# Altium PCB PCB1.PcbDoc
Units mm, origin at the board's own origin, x right, y up, seen from the top; angles counter-clockwise.
Board outline 104.52 x 39.62 mm, 4 copper layers (Layer 1, Layer 2, Layer 3, Layer 4), stack 0.603 mm thick; 8 components, 14 nets, 58 pads, 0 vias.
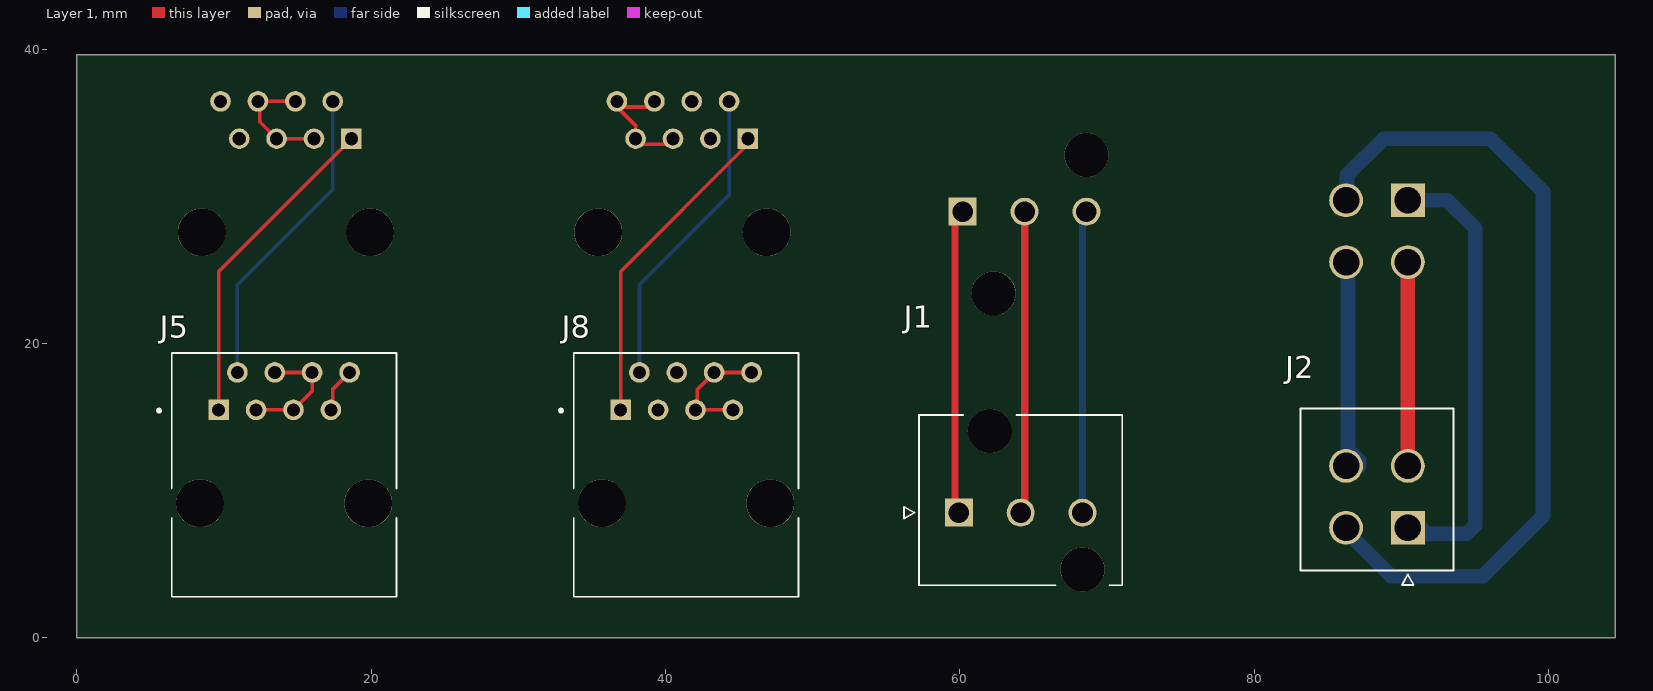
[diagram p0: Layer 1 view]
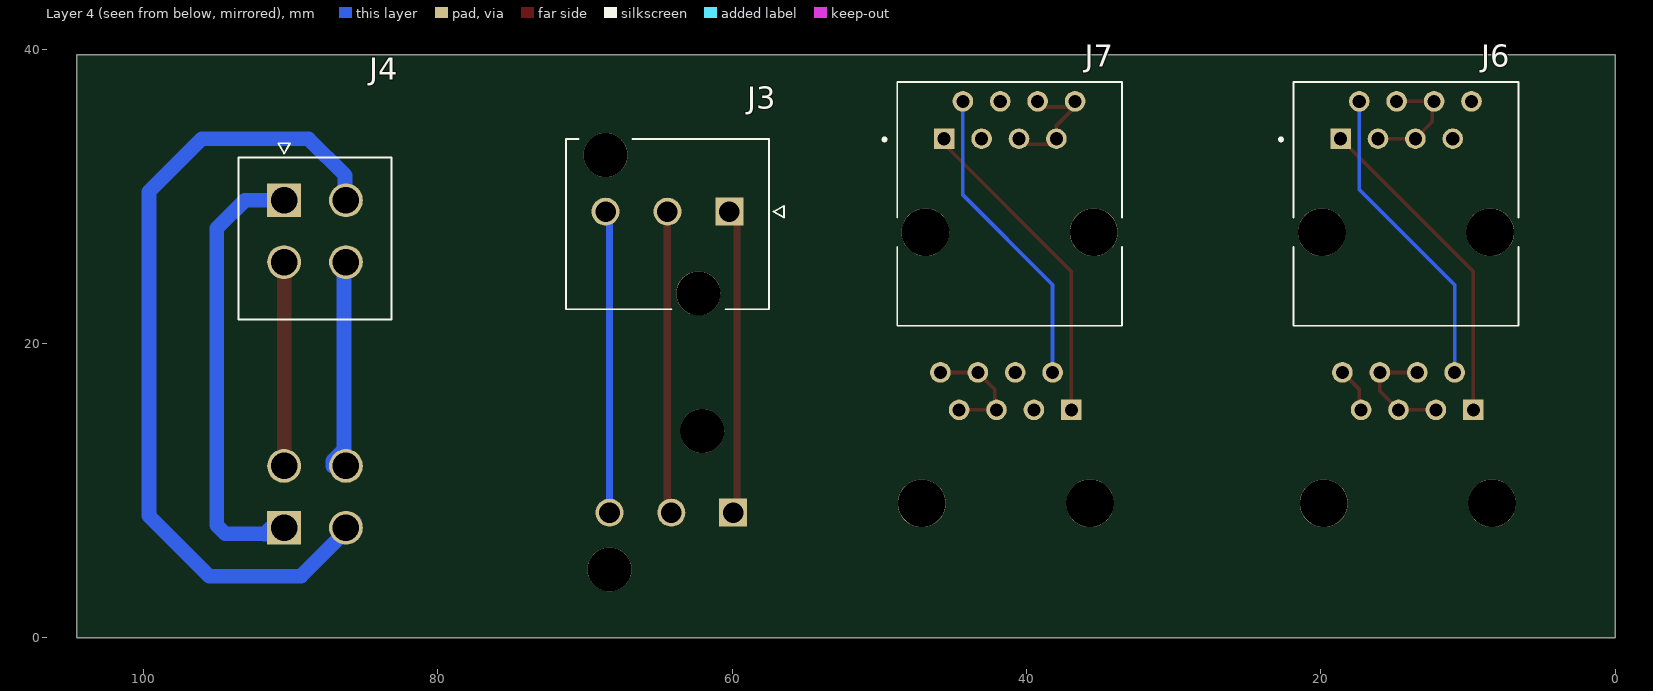
[diagram p1: Layer 4 view, seen from below]
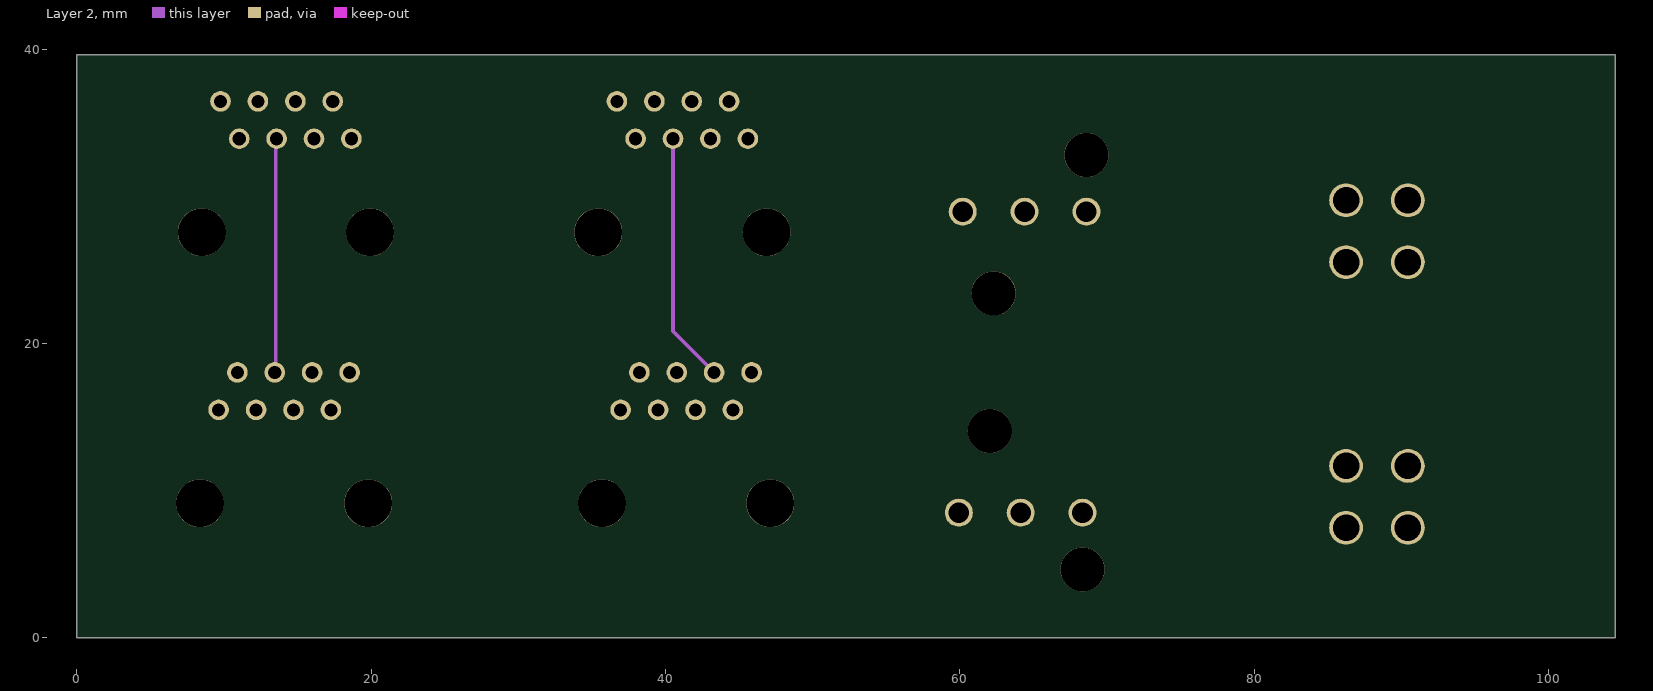
[diagram p2: Layer 2]
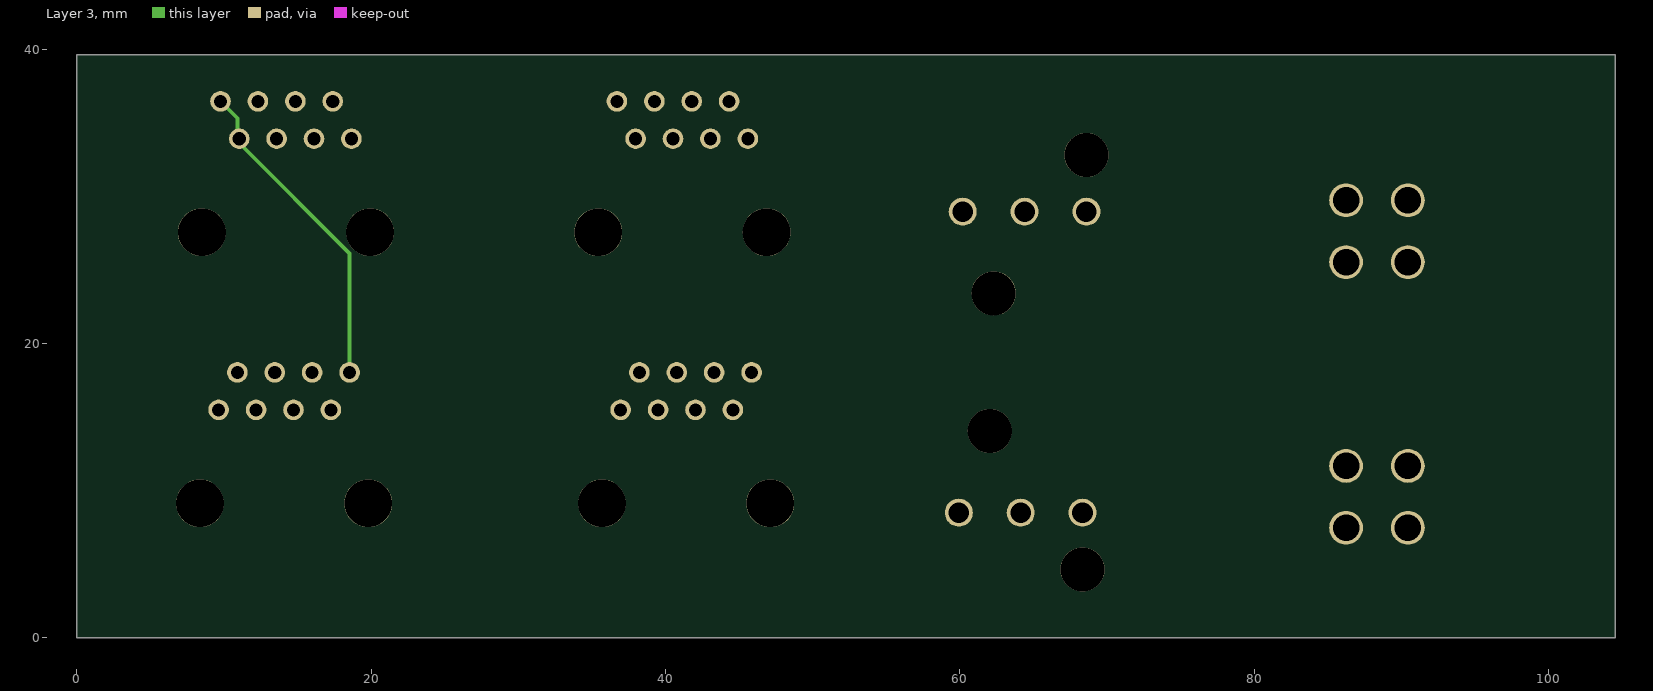
[diagram p3: Layer 3]
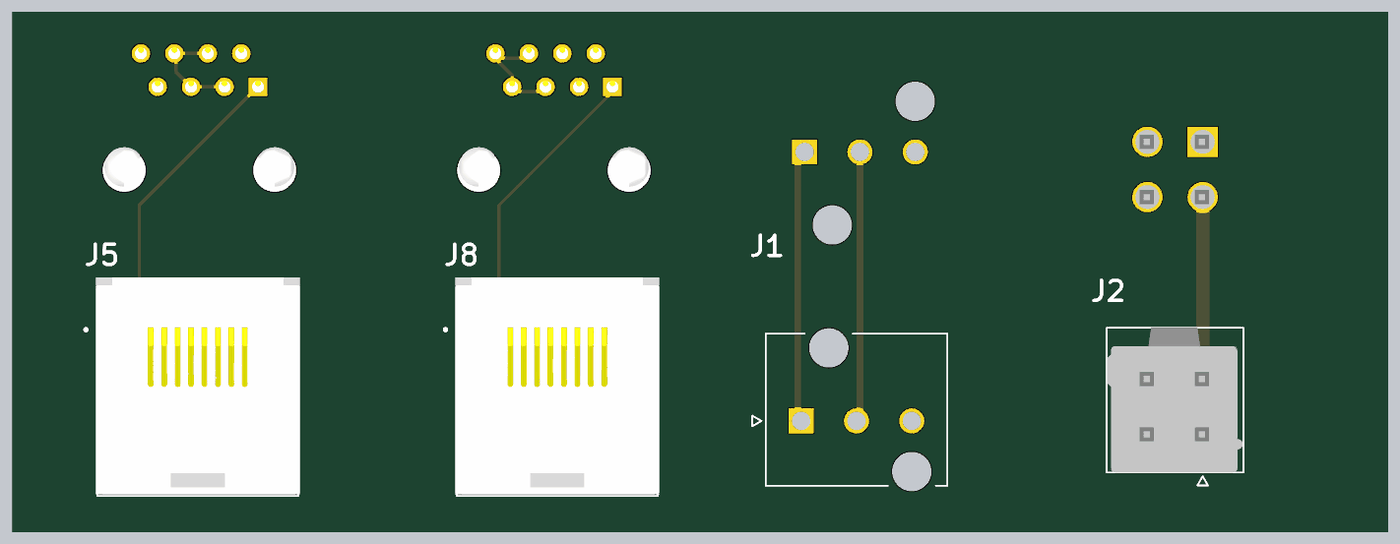
[diagram p4: 3D render of the assembled board from above, using the file's embedded part models]
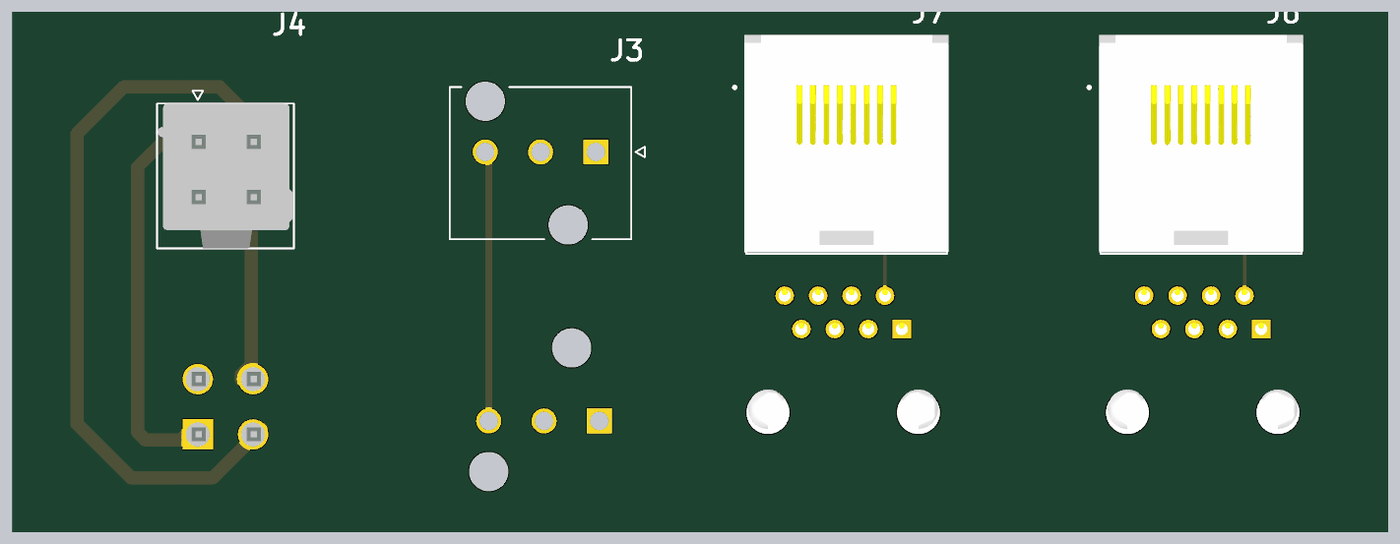
[diagram p5: 3D render of the assembled board from below, using the file's embedded part models]

## Layer stack, top to bottom
Top Solder: solder mask 0.0102, Solder Resist, Dk 3.5
Layer 1: signal copper 0.0356
Dielectric 1: prepreg 0.0711, FR-4, Dk 4.1
Layer 2: signal copper 0.035
Dielectric 2: dielectric 0.32, FR-4, Dk 4.8
Layer 3: signal copper 0.035
Dielectric 3: prepreg 0.0711, FR-4, Dk 4.1
Layer 4: signal copper 0.0356
Bottom Solder: solder mask 0.0102, Solder Resist, Dk 3.5

## Board outline
0,0 0,39.624 104.521,39.624 104.521,0

## Design rules (kind name [scope] priority, off if disabled: settings)
Clearance [All] p1: gap=0.254 ignorepadtopadclearanceinfootprint=FALSE except(0: Arc-Hole Track-Hole SMDPad-Hole THPad-Hole Via-Hole Fill-Hole Poly-Hole Region-Hole Text-Hole)
PolygonConnect [All] p1: connectstyle=Relief reliefconductorwidth=0.254 reliefentries=4 polygonreliefangle="90 Angle" airgapwidth=0.254
RoutingVias [All] p1: holewidth=0.711 width=1.27 viastyle="Through Hole" minholewidth=0.711 minwidth=1.27 maxholewidth=0.711 maxwidth=1.27
SolderMaskExpansion [All] p1: expansion=0.102 istentingtop=FALSE
Width [All] p1: maxlimit=1 minlimit=0.254 preferedwidth=0.254
30 further rules are at their usual default settings.

## Classes and differential pairs
component class Sheet1: J1 J2 J3 J4 J5 J6 J7

## Components (designator, comment, footprint, x,y, rotation, side; value= is the part's Value field where it differs from the comment)
J1 "460140305" "MOLEX_460140305_3pin header" 59.926,8.509 r180 top
J2 "Molex 4 pin Perp" MOLEX_462071004 90.424,7.484 r0 top
J3 "460140305" "MOLEX_460140305_3pin header" 60.189,28.956 r180 bottom
J4 "Molex 4 pin Perp" MOLEX_462071004 90.424,29.727 r0 bottom
J5 "RJ45_RJE081880110" RJ45_RJE081880110 14.097,9.144 r0 top
J6 "RJ45_RJE081880110" RJ45_RJE081880110 14.224,27.559 r180 bottom
J7 "RJ45_RJE081880110" RJ45_RJE081880110 41.148,27.559 r180 bottom
J8 "RJ45_RJE081880110" RJ45_RJE081880110 41.402,9.144 r0 top

## Footprints (in the part's own frame and the unit in brackets; to place one, negate y for a bottom-side part, rotate by r counter-clockwise, add the part's x,y. Pads: shape width x height; smd on the part's side, far side on the other; paste and mask are expansions set on the pad)
"MOLEX_460140305_3pin header" [mm]
  rect 1.9x1.9 / inner round 1.9 / far side rect 1.9x1.9 hole 1.4 mask+0.076: 1(0,0)
  round 1.9 hole 1.4 mask+0.076: 2(-4.2,0) 3(-8.4,0)
  round 3 hole 3 unplated mask+0.076: ""(-8.4,3.85) ""(-2.1,-5.55)
  silkscreen extent -11.1,-6.63 3.72,4.93
MOLEX_462071004 [mm]
  rect 2.3x2.3 / inner round 2.3 / far side rect 2.3x2.3 hole 1.8 mask+0.076: 1(0,0)
  round 2.3 hole 1.8 mask+0.076: 2(-4.2,0) 3(0,4.2) 4(-4.2,4.2)
  silkscreen extent -7.3,-3.88 3.1,8.1, body extent -7.26,-2.9 3.04,8.11, height 14
RJ45_RJE081880110 [mm]
  rect 1.398x1.398 / inner round 1.398 / far side rect 1.398x1.398 hole 0.89: 1(-4.445,6.35)
  round 1.398 hole 0.89: 2(-3.175,8.89) 3(-1.905,6.35) 4(-0.635,8.89) 5(0.635,6.35) 6(1.905,8.89) 7(3.175,6.35) 8(4.445,8.89)
  round 3.25 hole 3.25 unplated: ""(-5.715,0) ""(5.715,0)
  silkscreen extent -8.59,-6.35 7.63,10.21, body extent -7.75,-6.22 7.75,10.28, height 17

## Part data
J1 J3: Package=None, Availability=Unavailable, MP=460140305, Price=None
J2 J4: "Connector Header Through Hole 4 position 0.165in (4.20mm)", Package=None, Availability=Unavailable, MP=462071004, Price=None
J5 J6 J7 J8: "RJ45 Modular Jack - Verticals, Input Output Connectors 8P8C, Without Shield.", Package=None, Availability="In Stock", Check_prices=https://www.snapeda.com/parts/RJE081880110/Amphenol/view-part/?ref=eda, MF="Amphenol ICC (Commercial Products)", MP=RJE081880110, Price=None, Purchase-URL=https://pricing.snapeda.com/search/part/RJE081880110/?ref=eda, SnapEDA_Link=https://www.snapeda.com/parts/RJE081880110/Amphenol/view-part/?ref=snap

## Nets (pads, with @x,y where several pads share a name; then routed paths per layer and width w, separated by ;. In a path a pad name is that pad's centre, name@x,y a point inside that pad or via, vN(x,y) a via of type N, cw(c..) or ccw(c..) an arc to the next point about the centre after c; other vN are vias at no path point)
IH_3: J1.3 J3.3 | length 20.6
  Layer 4 w0.5: J1.3 68.326,28.693 J3.3
NetJ1_1: J1.1 J3.1 | length 20.8
  Layer 1 w0.5: J1.1 59.663,8.772 59.663,28.43 J3.1
NetJ1_2: J1.2 J3.2 | length 20.6
  Layer 1 w0.5: J1.2 64.389,8.772 J3.2
NetJ2_1: J2.1 J4.1 | length 29.6
  Layer 4 w1: J4.1 93.082,29.727 94.996,27.813 94.996,7.657 94.41,7.071 91.789,7.071 91.758,7.04 J2.1@91.313,7.484
NetJ2_3: J2.3 J4.3 | length 14.1
  Layer 1 w1: J4.3 90.424,12.319 J2.3@91.059,11.684
NetJ5_1: J5.1 J6.1 | length 22.1
  Layer 1 w0.254: J5.1 9.652,24.892 J6.1
NetJ5_2: J5.2 J6.2 | length 21.1
  Layer 4 w0.254: J5.2 10.922,23.989 17.399,30.466 J6.2
NetJ5_3: J5.3 J5.4 J5.5 J5.6 J6.3 J6.4 J6.5 J6.6 | length 32.2
  Layer 1 w0.254: J5.3 J5.5 16.002,16.764 J5.6 J5.4 ; J6.4 J6.6 12.439,36.329 12.439,35.059 J6.5 J6.3
  Layer 2 w0.254: J5.4 13.525,18.098 13.525,33.846 J6.5
NetJ5_7: J5.7 J5.8 J6.7 J6.8 | length 25.1
  Layer 1 w0.254: J5.7 17.392,15.614 17.392,16.884 J5.8
  Layer 3 w0.254: J6.8 10.929,35.299 10.929,34.029 J6.7 11.049,33.612 18.542,26.119 J5.8
NetJ7_1: J7.1 J8.1 | length 21.6
  Layer 1 w0.254: J8.1 36.957,24.892 J7.1@45.593,33.528
NetJ7_2: J7.2 J8.2 | length 20.6
  Layer 4 w0.254: J8.2 38.227,23.989 44.323,30.085 J7.2@44.323,36.068
NetJ7_5: J7.5 J7.6 J7.7 J7.8 J8.5 J8.6 J8.7 J8.8 | length 32.9
  Layer 1 w0.254: J7.6@39.243,36.068 36.703,36.068 37.973,34.798 37.973,33.528 J7.5@40.513,33.528 ; J8.7 J8.5 42.157,15.614 42.157,16.884 J8.6 J8.8
  Layer 2 w0.254: J7.5@40.513,33.528 40.513,20.828 J8.6
NetLabel127: J2.2 J4.2 | length 56.8
  Layer 4 w1: J2.2@85.617,7.855 89.281,4.191 95.504,4.191 99.608,8.295 99.608,30.313 96.012,33.909 88.773,33.909 86.281,31.417 86.281,29.784 J4.2
NetLabel129: J2.4 J4.4 | length 14.2
  Layer 4 w1: J4.4 86.36,25.391 86.36,12.789 87.113,12.036 J2.4@87.113,11.684
pads on no net: J1. J3. J5. J6. J7. J7.3 J7.4 J8. J8.3 J8.4

## Text inside footprints (layer, text, board x,y; h text height)
J1: Mechanical 13 "PTH D1.40+/-0.05" at 71.836,19.059 h0.5 r180; Mechanical 13 "NPTH D3.00+/-0.05" at 71.836,20.059 h0.5 r180
J2: Mechanical 13 "PTH D1.80 +/- 0.05" at 83.124,0.334 h0.5
J3: Mechanical 13 "PTH D1.40+/-0.05" at 72.099,18.406 h0.5; Mechanical 13 "NPTH D3.00+/-0.05" at 72.099,17.406 h0.5
J4: Mechanical 13 "PTH D1.80 +/- 0.05" at 83.124,36.877 h0.5 r180